# Allegro board KVM_USB-UART_V190428.brd
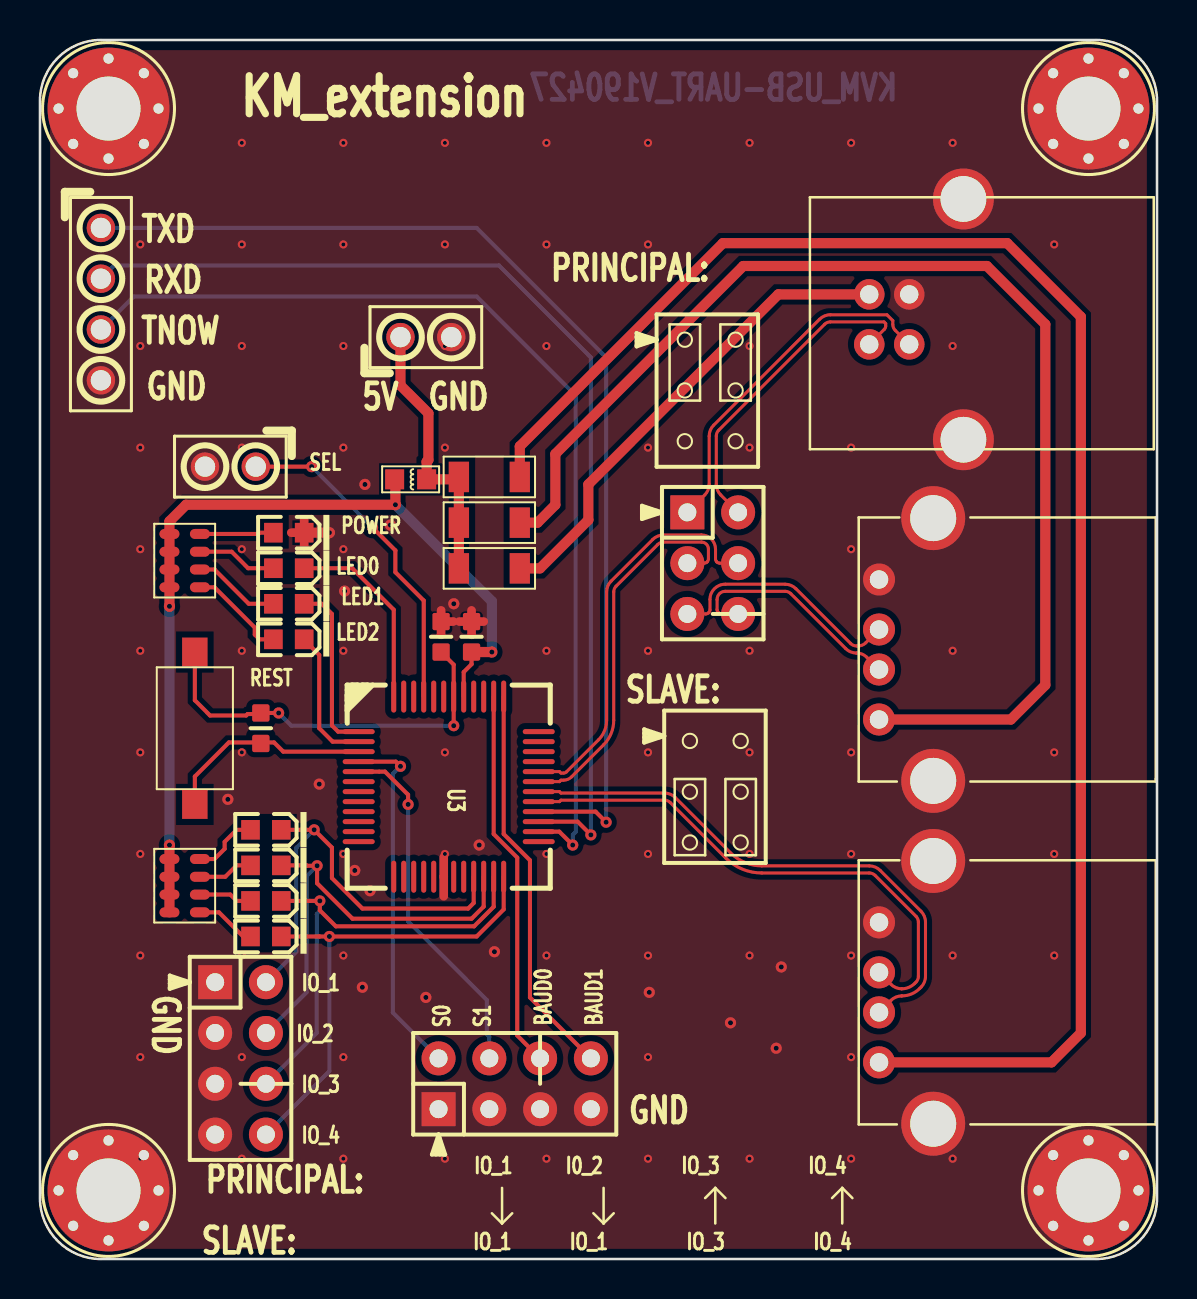
[diagram p0: board, top side]
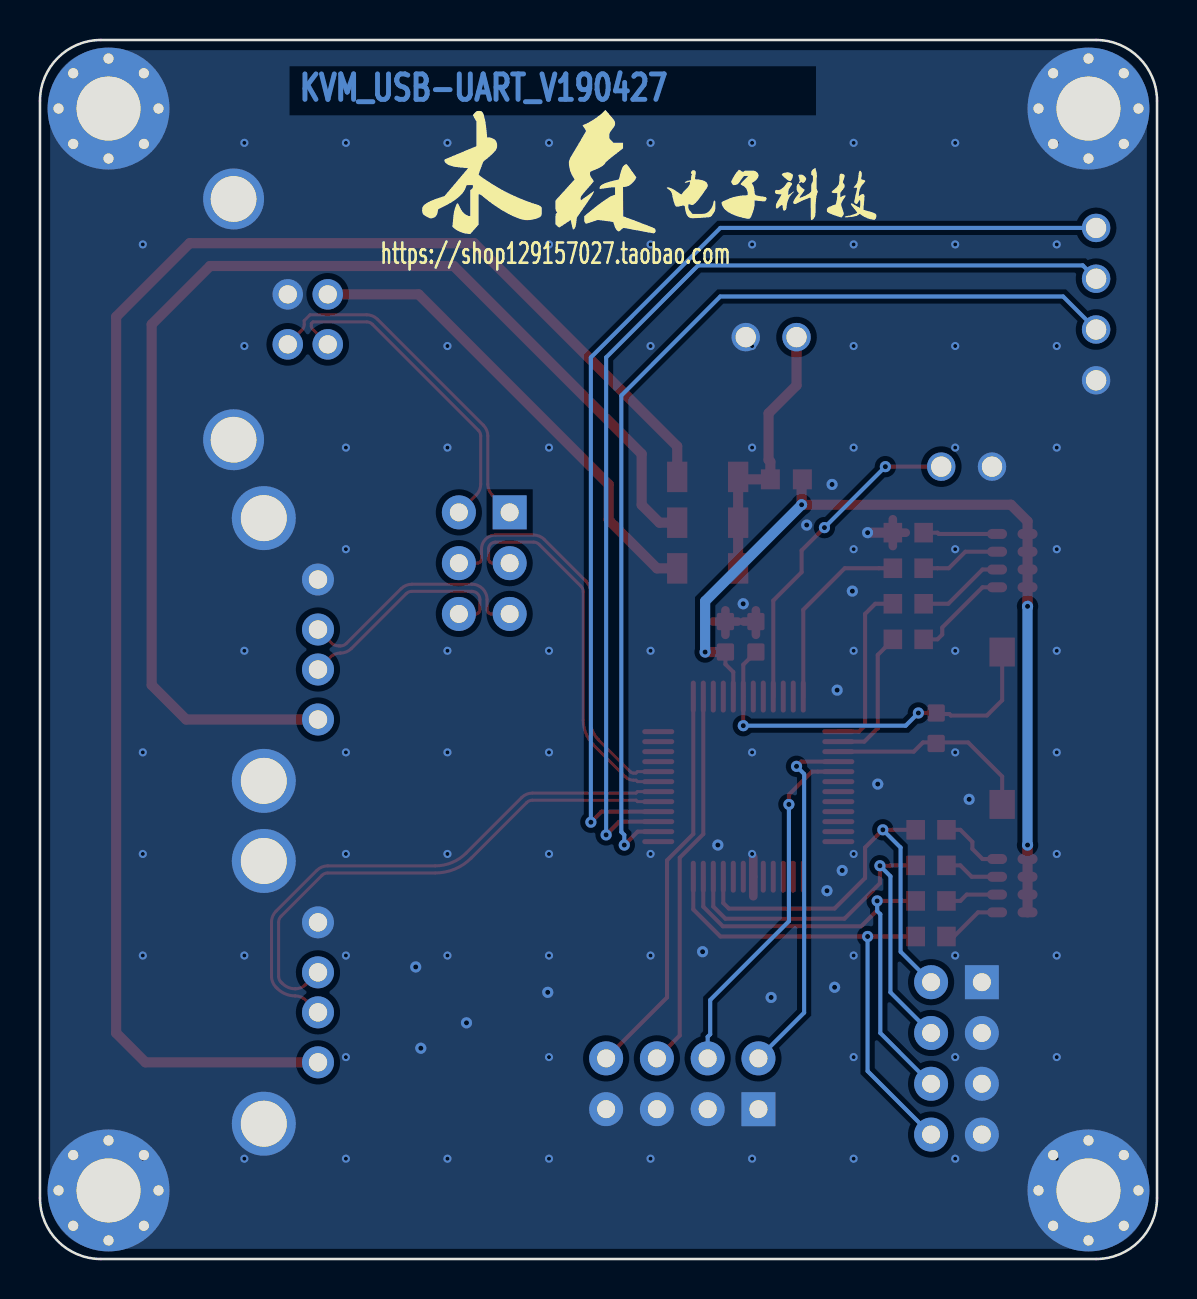
[diagram p1: board, bottom side, seen from below]

Outline 55.88 x 60.96 mm; copper layers: TOP, BOTTOM. Coordinates in mm from the lower left corner of the outline.
Outline path: 0,57.91 arc(0.89,60.07) 3.05,60.96 52.83,60.96 arc(54.99,60.07) 55.88,57.91 55.88,3.05 arc(54.99,0.89) 52.83,0 3.05,0 arc(0.89,0.89) 0,3.05 0,57.91

## Design rules (mm)
net group D: nets DM DP
net group D_DOWN: nets DM_DOWN DP_DOWN
net group DP1: nets DM_UP DP_UP
net group H_DOWN: nets HM_DOWN HP_DOWN

## Placement (name value [footprint] x y rotation side)
C1  10uF  [C0603]  20.07 31.12 0 top
C54  100nF  [C0603]  21.59 31.12 0 top
C79  1uF  [C0603]  11.05 26.54 180 top
D1  LED  [0603_LED_S1]  12.45 36.32 180 top
D2  LED  [0603_LED_S1]  12.45 34.54 180 top
D3  LED  [0603_LED_S1]  12.45 32.77 180 top
D4  LED  [0603_LED_S1]  12.45 30.99 180 top
D5  LED  [0603_LED_S1]  11.3 21.46 180 top
D6  LED  [0603_LED_S1]  11.3 19.69 180 top
D7  LED  [0603_LED_S1]  11.3 17.91 180 top
D8  LED  [0603_LED_S1]  11.3 16.13 180 top
F1  nSMD050-33V  [1206]  22.48 36.82 0 top
F2  nSMD050-33V  [1206]  22.48 34.54 0 top
F3  nSMD050-33V  [1206]  22.48 39.11 0 top
J1  CON6  [USB_A_4P_90]  41.97 30.48 90 top
J2  CON6  [USB_A_4P_90]  41.97 13.34 90 top
J3  HEADER 4X2  [HDR254M-2X4]  19.94 7.49 0 top
J4  HEADER 4X2  [HDR254M-2X4]  8.76 13.84 270 top
J5  CON4A  [TD-11XA]  7.75 26.54 90 top
J6  HEADER 3X2  [HDR254M-2X3]  32.38 37.34 270 top
J7  HEADER 2  [HDR_1X2_2R54]  9.53 39.62 180 top
J8  HEADER 4  [HDR_1X4_2R54]  3.05 47.75 270 top
J10  HEADER 2  [HDR_1X2_2R54]  19.3 46.1 0 top
L4  FB470  [L0603]  18.54 38.99 180 top
M1  HOLE2  [MTH_C6MMD3P2MM_1]  52.45 57.53 0 top
M2  HOLE2  [MTH_C6MMD3P2MM_1]  3.43 3.43 0 top
M3  HOLE2  [MTH_C6MMD3P2MM_1]  3.43 57.53 0 top
M4  HOLE2  [MTH_C6MMD3P2MM_1]  52.45 3.43 0 top
NOREF  -  []  3.05 49.02 90 top
NOREF#2  -  []  8.25 39.62 0 top
NOREF#3  -  []  18.03 46.1 0 top
NOREF#4  -  []  3.05 43.94 90 top
NOREF#5  -  []  45.04 12.68 180 bottom
RP1  22R  [RP-4]  8 36.26 180 top
RP2  22R  [RP-4]  8 20 180 top
U3  CH9350DS  [LQFP_48]  20.45 23.62 270 top
U9  USB_MINI-B_1  [USB_B_90_1]  41.48 48.24 90 top

## Library data of the parts
C1 C54 C79 = CAP NP: room: IN1
D1-D8 = LED_0
F1-F3 = FUSE
J1 J2 = CON6
J3 J4 = HEADER 4X2: User Part Number: pn; Tolerance: RichardLC
J5 = CON4A_0
J6 = HEADER 3X2: User Part Number: pn; Tolerance: RichardLC
J7 J10 = HEADER 2
J8 = HEADER 4
L4 = INDUCTOR: room: MID
M1-M4 = HOLE2_2
RP1 RP2 = RPACK4
U3 = CH93650DS
U9 = USB_MINI-B_1

## Footprints (pads in the part's own frame, mm; a bottom-side part is the same pattern mirrored in y, then rotated)
0603_LED_S1
  rect 0.93x0.98 smd: A(0.77,0) K(-0.77,0)
1206
  rect 1.016x1.524 smd: 1(-1.524,0) 2(1.524,0)
C0603
  custom 0.864x0.864 smd: 1(0,0.762) 2(0,-0.762)
HDR254M-2X3
  rect 1.7x1.7 hole 0.9: 1(0,0)
  round 1.7 hole 0.9: 2(0,2.54) 3(2.54,0) 4(2.54,2.54) 5(5.08,0) 6(5.08,2.54)
HDR254M-2X4
  rect 1.7x1.7 hole 0.9: 1(0,0)
  round 1.7 hole 0.9: 2(0,2.54) 3(2.54,0) 4(2.54,2.54) 5(5.08,0) 6(5.08,2.54) 7(7.62,0) 8(7.62,2.54)
HDR_1X2_2R54
  round 1.422 hole 1.016: 1(-1.27,0) 2(1.27,0)
HDR_1X4_2R54
  round 1.422 hole 1.016: 1(-3.81,0) 2(-1.27,0) 3(1.27,0) 4(3.81,0)
L0603
  rect 0.95x1 smd: 1(-0.8,0) 2(0.8,0)
LQFP_48
  oval 0.25x1.6 smd: 1(-2.75,-4.504) 2(-2.25,-4.504) 3(-1.75,-4.504) 4(-1.25,-4.504) 5(-0.75,-4.504) 6(-0.25,-4.504) 7(0.25,-4.504) 8(0.75,-4.504) 9(1.25,-4.504) 10(1.75,-4.504) 11(2.25,-4.504) 12(2.75,-4.504) 25(2.75,4.504) 26(2.25,4.504) 27(1.75,4.504) 28(1.25,4.504) 29(0.75,4.504) 30(0.25,4.504) 31(-0.25,4.504) 32(-0.75,4.504) 33(-1.25,4.504) 34(-1.75,4.504) 35(-2.25,4.504) 36(-2.75,4.504)
  oval 1.6x0.25 smd: 13(4.504,-2.75) 14(4.504,-2.25) 15(4.504,-1.75) 16(4.504,-1.25) 17(4.504,-0.75) 18(4.504,-0.25) 19(4.504,0.25) 20(4.504,0.75) 21(4.504,1.25) 22(4.504,1.75) 23(4.504,2.25) 24(4.504,2.75) 37(-4.504,2.75) 38(-4.504,2.25) 39(-4.504,1.75) 40(-4.504,1.25) 41(-4.504,0.75) 42(-4.504,0.25) 43(-4.504,-0.25) 44(-4.504,-0.75) 45(-4.504,-1.25) 46(-4.504,-1.75) 47(-4.504,-2.25) 48(-4.504,-2.75)
MTH_C6MMD3P2MM_1
  round 6.096 hole 3.2: 1(0,0)
  round 1.016 hole 0.508: 2(2.5,0) 3(1.768,1.768) 4(0,2.5) 5(-1.768,1.768) 6(-2.5,0) 7(-1.768,-1.768) 8(0,-2.5) 9(1.768,-1.768)
RP-4
  oval 1x0.5 smd: 1(0,0) 2(0,0.889) 3(0,1.778) 4(0,2.667) 5(1.524,2.667) 6(1.524,1.778) 7(1.524,0.889) 8(1.524,0)
TD-11XA
  rect 1.448x1.27 smd: 1(-3.81,0) 2(3.81,0)
USB_A_4P_90
  round 1.6 hole 0.92: 1(-3.5,0) 2(-1,0) 3(1,0) 4(3.5,0)
  round 3.2 hole 2.3: 5(-6.57,-2.71) 6(6.57,-2.71)
USB_B_90_1
  round 1.524 hole 0.914: 1(0,0) 2(-2.5,0) 3(-2.5,-2) 4(0,-2)
  round 3.048 hole 2.286: 5(-7.27,-4.71) 6(4.77,-4.71)

## Nets
GND: C1.1 C54.1 D1.K(CATHODE) J1.4 J1.5 J1.6 J2.4 J2.5 J2.6 J3.1 J3.3 J3.5 J3.7 J4.1 J4.3 J4.5 J4.7 J7.2 J8.4 J10.2 M1.1 M1.2 M1.3 M1.4 M1.5 M1.6 M1.7 M1.8 M1.9 M2.1 M2.2 M2.3 M2.4 M2.5 M2.6 M2.7 M2.8 M2.9 M3.1 M3.2 M3.3 M3.4 M3.5 M3.6 M3.7 M3.8 M3.9 M4.1 M4.2 M4.3 M4.4 M4.5 M4.6 M4.7 M4.8 M4.9 U3.18(GND) U9.4(GND) U9.5(GND_1) U9.6(GND_3)
VCC_5V: F1.1 F2.1 F3.1 J10.1 L4.1
VCC_5V_M: C54.2 L4.2 RP1.5(O4) RP1.6(O3) RP1.7(O2) RP1.8(O1) RP2.5(O4) RP2.6(O3) RP2.7(O2) RP2.8(O1) U3.41(VIN5)
VDD3V3: C1.2 C79.2 J5.2 U3.42(VDD33)
BAUD0: J3.6 U3.38(BUAD0)
BAUD1: J3.8 U3.37(BAUD1)
DM: J6.4 U3.32(DM)
DM_DOWN: J1.2 J6.6
DM_UP: J6.2 U9.2(DN)
DP: J6.3 U3.31(DP)
DP_DOWN: J1.3 J6.5
DP_UP: J6.1 U9.3(DP)
HM_DOWN: J2.2 U3.30(HM)
HP_DOWN: J2.3 U3.29(HP)
IO_1: D5.K(CATHODE) J4.2 U3.21(IO1)
IO_2: D6.K(CATHODE) J4.4 U3.22(IO2)
IO_3: D7.K(CATHODE) J4.6 U3.23(IO3)
IO_4: D8.K(CATHODE) J4.8 U3.24(IO4)
LED0: D2.K(CATHODE) U3.48(LED0)
LED1: D3.K(CATHODE) U3.1(LED1)
LED2: D4.K(CATHODE) U3.2(LED2)
RST: C79.1 J5.1 U3.3(RST)
RXD: J8.2 U3.27(RXD)
S0: J3.2 U3.4(RESV0)
S1: J3.4 U3.5(NC_1)
SEL: J7.1 U3.45(SEL)
TNOW: J8.3 U3.26(TNOW)
TXD: J8.1 U3.28(TXD)
N17487303: F2.2 U9.1(VCC)
N17531485: F1.2 J1.1
N17531678: F3.2 J2.1
N17533270: D2.A(ANODE) RP1.2(I2)
N17533273: D3.A(ANODE) RP1.3(I3)
N17533286: D1.A(ANODE) RP1.1(I1)
N17533403: D4.A(ANODE) RP1.4(I4)
N17537195: D6.A(ANODE) RP2.2(I2)
N17537197: D7.A(ANODE) RP2.3(I3)
N17537199: D5.A(ANODE) RP2.1(I1)
N17537201: D8.A(ANODE) RP2.4(I4)

Pads without a net: U3 6 7 8 9 10 11 12 13 14 15 16 17 19 20 25 33 34 35 36 39 40 43 44 46 47

## Via types
v1: diameter 0.559, hole 0.254, TOP to BOTTOM, 35 vias
v2: diameter 0.406, hole 0.203, TOP to BOTTOM, 83 vias

## Routing (per net, layer and track width the routed paths; a pad name or vN(x,y) marks a point on that pad's centre or on a via; arc(x,y) is an arc through that point)
GND: length 9.5
  TOP w0.432: C54.1 22.2,31.88 ; C54.1 20.98,31.88 ; C54.1 21.59,31.22 ; C54.1 21.59,32.44 ; C1.1 20.68,31.88 ; C1.1 20.07,32.44 ; C1.1 20.07,31.22 ; 20.2,18.14 U3.18 20.2,20.1 ; D1.K 13.22,36.99 ; D1.K 12.57,36.32 ; D1.K 13.22,35.65
  TOP w0.508: v1(14.48,36.32) D1.K
  vias: v1(9.4,22.99) v1(13.97,23.75) v1(15.24,33.4) v1(15.75,19.43) v1(16,28.45) v1(16.13,13.59) v1(16.26,38.73) v1(16.51,18.41) v1(17.53,36.7) v1(19.3,13.08) v1(20.7,32.77) v1(21.97,20.7) v1(22.73,15.37) v1(30.48,13.34) v1(34.54,11.81) v1(36.83,10.54) v1(37.08,14.61) v2(5.02,55.82) v2(5.02,50.74) v2(5.02,45.66) v2(5.02,40.58) v2(5.02,35.5) v2(5.02,30.42) v2(5.02,25.34) v2(5.02,20.26) v2(5.02,15.18) v2(5.02,10.1) v2(5.02,5.02) v2(10.1,55.82) v2(10.1,50.74) v2(10.1,45.66) v2(10.1,40.58) v2(10.1,35.5) v2(10.1,30.42) v2(10.1,25.34) v2(10.1,15.18) v2(10.1,10.1) v2(10.1,5.02) v2(15.18,55.82) v2(15.18,50.74) v2(15.18,45.66) v2(15.18,40.58) v2(15.18,35.5) v2(15.18,30.42) v2(15.18,20.26) v2(15.18,15.18) v2(15.18,10.1) v2(15.18,5.02) v2(20.26,55.82) v2(20.26,50.74) v2(20.26,45.66) v2(20.26,40.58) v2(20.26,25.34) v2(20.26,20.26) v2(20.26,5.02) v2(25.34,55.82) v2(25.34,50.74) v2(25.34,45.66) v2(25.34,30.42) v2(25.34,20.26) v2(25.34,15.18) v2(25.34,5.02) v2(30.42,55.82) v2(30.42,50.74) v2(30.42,40.58) v2(30.42,30.42) v2(30.42,25.34) v2(30.42,20.26) v2(30.42,15.18) v2(30.42,10.1) v2(30.42,5.02) v2(35.5,55.82) v2(35.5,45.66) v2(35.5,40.58) v2(35.5,30.42) v2(35.5,25.34) v2(35.5,20.26) v2(35.5,15.18) v2(35.5,5.02) v2(40.58,55.82) v2(40.58,40.58) v2(40.58,35.5) v2(40.58,25.34) v2(40.58,20.26) v2(40.58,15.18) v2(40.58,10.1) v2(40.58,5.02) v2(45.66,55.82) v2(45.66,45.66) v2(45.66,40.58) v2(45.66,30.42) v2(45.66,20.26) v2(45.66,15.18) v2(45.66,5.02) v2(50.74,55.82) v2(50.74,50.74) v2(50.74,25.34) v2(50.74,20.26) v2(50.74,15.18) v2(50.74,5.02)
VCC_5V: length 14
  TOP w0.508: J10.1 18.03,43.69 19.43,42.29 19.43,39.96 19.34,39.87 L4.1 20.83,38.99 F3.1 F1.1 F2.1
VCC_5V_M: length 45.3
  TOP w0.203: U3.41 21.2,29.35 21.59,29.74 C54.2
  TOP w0.508: L4.2 17.78,38.95 v1(17.78,37.72) 7.31,37.72 6.48,36.89 RP1.8 RP1.7 RP1.6 RP1.5 v1(6.48,32.64) ; v1(6.48,20.7) RP2.8 RP2.7 RP2.6 RP2.5 ; C54.2 v1(22.61,30.35)
  BOTTOM w0.508: v1(22.61,30.35) 22.61,32.89 v1(17.78,37.72) ; v1(6.48,20.7) v1(6.48,32.64)
VDD3V3: length 19.9
  TOP w0.203: v1(20.7,26.67) U3.42 20.7,29.72 C1.2 ; v1(11.94,27.3) C79.2 11,27.25 10.39,27.25 10.31,27.18 8.51,27.18 7.75,27.94 J5.2
  BOTTOM w0.203: v1(20.7,26.67) 12.57,26.67 v1(11.94,27.3)
BAUD0: length 19.1
  TOP w0.203: J3.6 23.88,11.18 23.88,20.07 22.7,21.25 U3.38
BAUD1: length 19.9
  TOP w0.203: J3.8 24.51,13.08 24.51,19.94 23.2,21.25 U3.37
DM: length 20.1
  TOP w0.152: U3.32 25.99,24.37 26.06,24.3 26.19,24.3 arc(26.27,24.32) 26.34,24.36 27.94,25.96 arc(28.24,26.41) 28.35,26.94 28.35,33.36 arc(28.4,33.65) 28.57,33.9 30.65,35.98 arc(30.9,36.15) 31.19,36.21 33.09,36.21 arc(33.59,36) 33.79,35.5 33.79,35 arc(33.81,34.93) 33.85,34.87 33.87,34.85 arc(33.93,34.81) 34,34.8 J6.4
DM_DOWN: length 11.6
  TOP w0.152: J6.6 34.07,32.26 arc(34,32.27) 33.95,32.31 33.92,32.33 arc(33.89,32.39) 33.87,32.46 33.87,32.98 arc(33.99,33.27) 34.28,33.39 37.27,33.39 arc(37.43,33.36) 37.56,33.27 40.31,30.53 arc(40.55,30.36) 40.85,30.3 40.86,30.3 arc(41.13,30.25) 41.36,30.1 J1.2
DM_UP: length 16.5
  TOP w0.152: J6.2 34.06,38.21 arc(33.89,38.45) 33.83,38.75 33.83,41.16 arc(33.86,41.31) 33.95,41.44 39.25,46.74 arc(39.38,46.83) 39.54,46.86 42.22,46.86 42.31,46.78 42.31,46.65 arc(42.29,46.57) 42.24,46.5 U9.2
DP: length 19.5
  TOP w0.152: U3.31 25.99,23.87 26.06,23.94 26.19,23.94 arc(26.41,23.99) 26.59,24.11 28.19,25.71 arc(28.57,26.28) 28.7,26.94 28.7,33.36 arc(28.73,33.52) 28.82,33.65 30.91,35.73 arc(31.04,35.82) 31.19,35.85 33.09,35.85 arc(33.34,35.75) 33.44,35.5 33.44,35 arc(33.42,34.93) 33.39,34.87 33.36,34.85 arc(33.31,34.81) 33.24,34.8 J6.3
DP_DOWN: length 12.2
  TOP w0.152: J1.3 41.31,30.81 arc(41.13,30.7) 40.93,30.66 40.85,30.66 arc(40.69,30.69) 40.56,30.78 37.81,33.52 arc(37.57,33.69) 37.27,33.74 34.28,33.74 arc(33.74,33.52) 33.52,32.98 33.52,32.46 arc(33.5,32.39) 33.46,32.33 33.44,32.31 arc(33.38,32.27) 33.31,32.26 J6.5
DP_UP: length 17.7
  TOP w0.152: J6.1 33.25,38.21 arc(33.42,38.45) 33.48,38.75 33.48,41.16 arc(33.54,41.45) 33.7,41.7 39,47 arc(39.25,47.16) 39.54,47.22 42.37,47.22 42.66,46.93 42.66,46.73 arc(42.69,46.57) 42.78,46.44 U9.3
HM_DOWN: length 28.2
  TOP w0.152: 41.72,12.08 J2.2 42.57,12.93 arc(42.82,13.1) 43.11,13.16 arc(43.6,13.25) 44.01,13.53 44.07,13.59 arc(44.24,13.84) 44.3,14.13 44.3,16.85 arc(44.24,17.14) 44.07,17.39 42.03,19.44 arc(41.78,19.6) 41.49,19.66 36.11,19.66 arc(35.27,19.83) 34.56,20.3 31.78,23.08 arc(31.54,23.24) 31.24,23.3 26.06,23.3 25.99,23.37 U3.30
HP_DOWN: length 26.8
  TOP w0.152: U3.29 25.99,22.87 26.06,22.94 31.24,22.94 arc(31.4,22.91) 31.53,22.83 34.31,20.05 arc(35.13,19.5) 36.11,19.3 41.49,19.3 arc(41.64,19.27) 41.78,19.18 43.82,17.14 arc(43.91,17.01) 43.94,16.85 43.94,14.13 arc(43.91,13.98) 43.82,13.85 43.76,13.78 arc(43.46,13.58) 43.11,13.51 arc(42.82,13.57) 42.57,13.74 J2.3
IO_1: length 22.2
  TOP w0.203: U3.21 21.7,17.8 21.42,17.53 16.13,17.53 14.61,19.05 14.61,20.57 v1(13.72,21.46) 13.25,21.46 D5.K
  BOTTOM w0.203: J4.2 12.83,15.37 12.83,20.57 v1(13.72,21.46)
IO_2: length 22.9
  TOP w0.203: U3.22 22.2,17.63 21.59,17.02 15.64,17.02 13.86,18.79 v1(13.86,19.67) 13.35,19.67 13.33,19.69 D6.K
  BOTTOM w0.203: v1(13.86,19.67) 13.34,19.14 13.34,13.34 J4.4
IO_3: length 23.6
  TOP w0.203: D7.K 13.49,17.91 v1(14,17.91) 14,17.44 14.8,16.64 21.72,16.64 22.7,17.62 U3.23
  BOTTOM w0.203: v1(14,17.91) 14,17.4 13.84,17.24 13.84,11.3 J4.6
IO_4: length 24.5
  TOP w0.203: D8.K 13.97,16.13 13.97,16.13 v1(14.48,16.13) 21.84,16.13 23.2,17.48 U3.24
  BOTTOM w0.203: v1(14.48,16.13) 14.48,9.4 J4.8
LED0: length 9.7
  TOP w0.203: U3.48 17.7,32.47 15.62,34.54 13.91,34.54 D2.K
LED1: length 8.6
  TOP w0.203: U3.1 14.91,26.37 14.61,26.68 14.61,32.26 14.1,32.77 D3.K
LED2: length 7
  TOP w0.203: U3.2 14.64,25.87 13.97,26.54 13.97,30.21 13.22,30.96 D4.K
RST: length 10.5
  TOP w0.203: U3.3 12.17,25.37 11.71,25.83 11.1,25.83 C79.1 11,25.83 9.45,25.83 7.75,24.13 7.75,22.73
RXD: length 53.5
  TOP w0.203: U3.27 26.9,21.87 v1(27.56,21.21)
  BOTTOM w0.203: J8.2 3.71,49.69 22.96,49.69 27.56,45.09 v1(27.56,21.21)
S0: length 17.9
  TOP w0.203: U3.4 17.8,24.87 v1(18.03,24.64)
  BOTTOM w0.203: J3.2 17.65,12.32 17.65,24.26 v1(18.03,24.64)
S1: length 17.8
  TOP w0.203: v1(18.41,22.73) 18.41,23.22 17.26,24.37 U3.5
  BOTTOM w0.203: v1(18.41,22.73) 18.41,16.89 22.35,12.95 22.35,11.24 22.48,11.11 J3.4
SEL: length 16.6
  TOP w0.203: J7.1 v1(13.59,39.62) ; v1(16.64,36.58) 17.78,35.43 17.78,34.34 19.2,32.93 U3.45
  BOTTOM w0.203: v1(13.59,39.62) v1(16.64,36.58)
TNOW: length 51
  TOP w0.203: U3.26 25.98,21.37 v1(26.65,20.7)
  BOTTOM w0.203: v1(26.65,20.7) 26.65,21.21 26.8,21.36 26.8,43.18 21.84,48.13 4.7,48.13 J8.3
TXD: length 54.8
  TOP w0.203: v1(28.32,21.84) 27.79,22.37 U3.28
  BOTTOM w0.203: J8.1 21.84,51.56 28.32,45.09 v1(28.32,21.84)
N17487303: length 24.2
  TOP w0.508: F2.2 25.01,34.54 27.43,36.96 27.43,38.73 36.94,48.24 U9.1
N17531485: length 61.4
  TOP w0.508: J1.1 48.57,26.98 50.29,28.7 50.29,46.74 47.37,49.66 35.18,49.66 25.78,40.26 25.78,37.71 24.89,36.82 F1.2
N17531678: length 81.8
  TOP w0.508: J2.1 50.6,9.83 52.07,11.3 52.07,47.12 48.39,50.8 34.16,50.8 24,40.64 F3.2
N17533270: length 4
  TOP w0.203: RP1.2 9.59,35.37 10.41,34.54 10.98,34.54 D2.A
N17533273: length 4.4
  TOP w0.203: RP1.3 8.73,34.48 10.44,32.77 D3.A
N17533286: length 3.7
  TOP w0.203: RP1.1 10.92,36.26 10.98,36.32 D1.A
N17533403: length 5
  TOP w0.203: D4.A 10.98,30.99 10.74,31.23 10.74,31.58 8.73,33.59 RP1.4
N17537195: length 2.8
  TOP w0.203: D6.A 9.84,19.69 9.27,19.11 RP2.2
N17537197: length 2.7
  TOP w0.203: D7.A 9.84,17.91 9.52,18.22 RP2.3
N17537199: length 3.3
  TOP w0.203: D5.A 9.84,21.46 9.24,20.86 9.24,20.51 8.73,20 RP2.1
N17537201: length 3
  TOP w0.203: RP2.4 8.95,17.34 10.16,16.13 D8.A

## Copper pours and planes (outline as drawn; the poured copper is in the pictures)
GND on TOP: 55.37,3.05 54.63,1.25 52.83,0.51 3.05,0.51 1.25,1.25 0.51,3.05 0.51,57.91 1.25,59.71 3.05,60.45 52.83,60.45 54.63,59.71 55.37,57.91 ; 5 cut-outs
GND on BOTTOM: 55.37,3.05 54.63,1.25 52.83,0.51 3.05,0.51 1.25,1.25 0.51,3.05 0.51,57.91 1.25,59.71 3.05,60.45 52.83,60.45 54.63,59.71 55.37,57.91

## Text on the board
BOTTOM: KVM_USB-UART_V190427
Ref Des/Silkscreen Bottom: https://shop129157027.taobao.com
Ref Des/Silkscreen Top: REST | I0_2 | IO_1 | IO_3 | IO_4 | SEL | LED0 | LED2 | POWER | LED1 | S0 | S1 | BAUD0 | BAUD1 | TNOW | TXD | RXD | GND | SLAVE: | PRINCIPAL: | 5V | KM_extension
User.20: FIGURE | SIZE | 8.0 | 10.0 | 20.0 | 35.43 | 36.0 | 36.22 | 40.0 | 90.0 | 90.55 | 126.0 | DRILL CHART: TOP to BOTTOM | ALL UNITS ARE IN MILS | TOLERANCE | +0.0/-0.0 | +3.0/-3.0 | PLATED | QTY | 83 | 35 | 32 | 22 | 4 | 8 | 2
